# Altium PCB ATRACK_Dongle_V1.PcbDoc
Units mm, origin at the board's own origin, x right, y up, seen from the top; angles counter-clockwise.
Board outline 44 x 20.5 mm, 2 copper layers (Top Layer, Bottom Layer); 34 components, 28 nets, 135 pads, 10 vias.
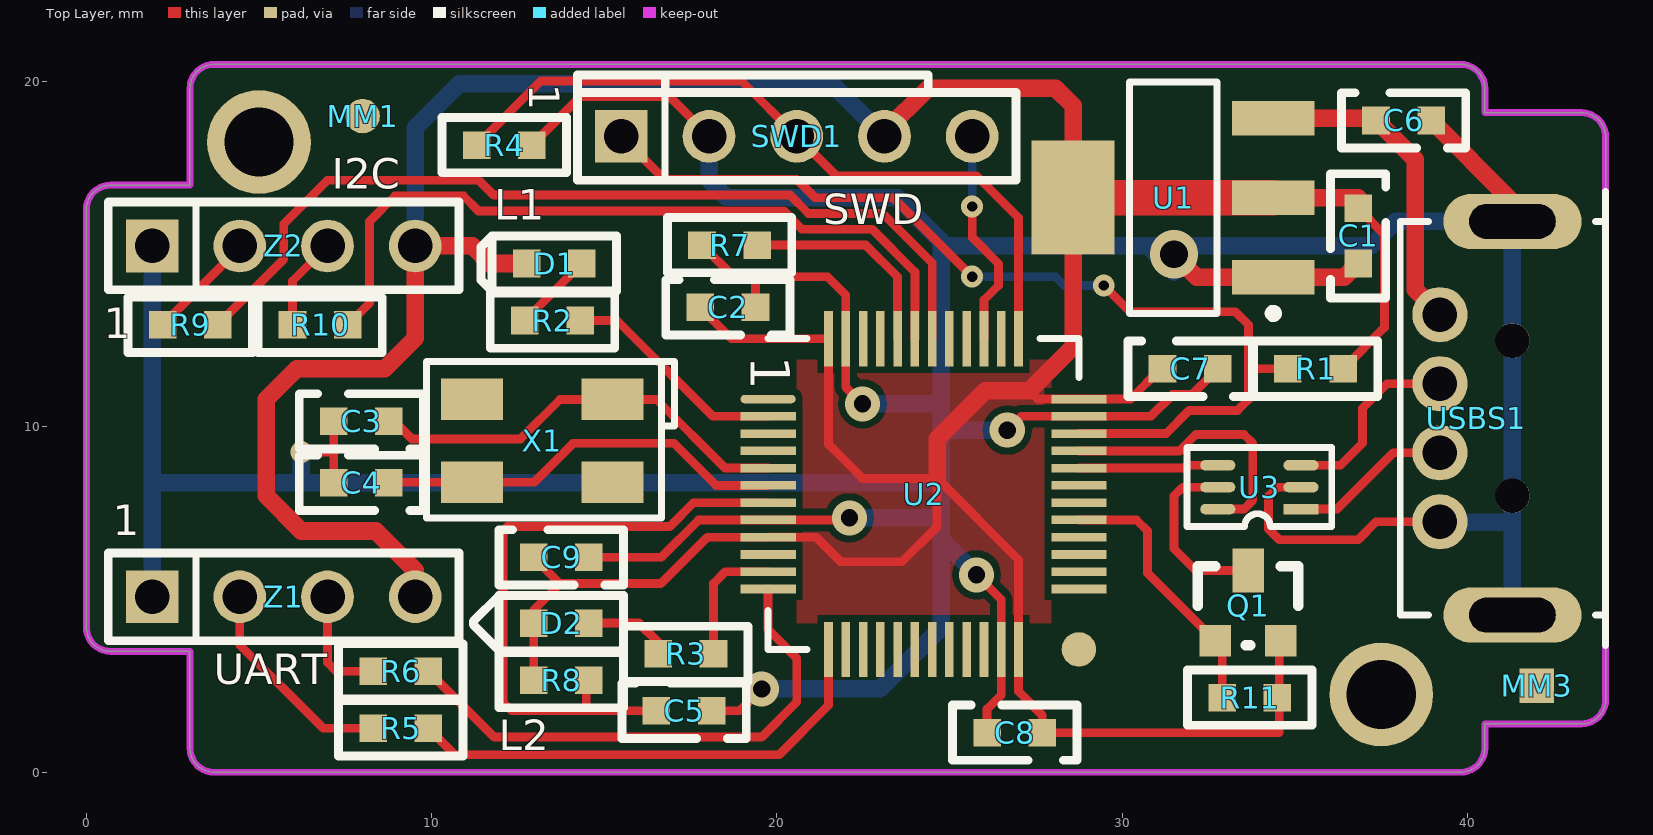
[diagram p0: Top Layer view]
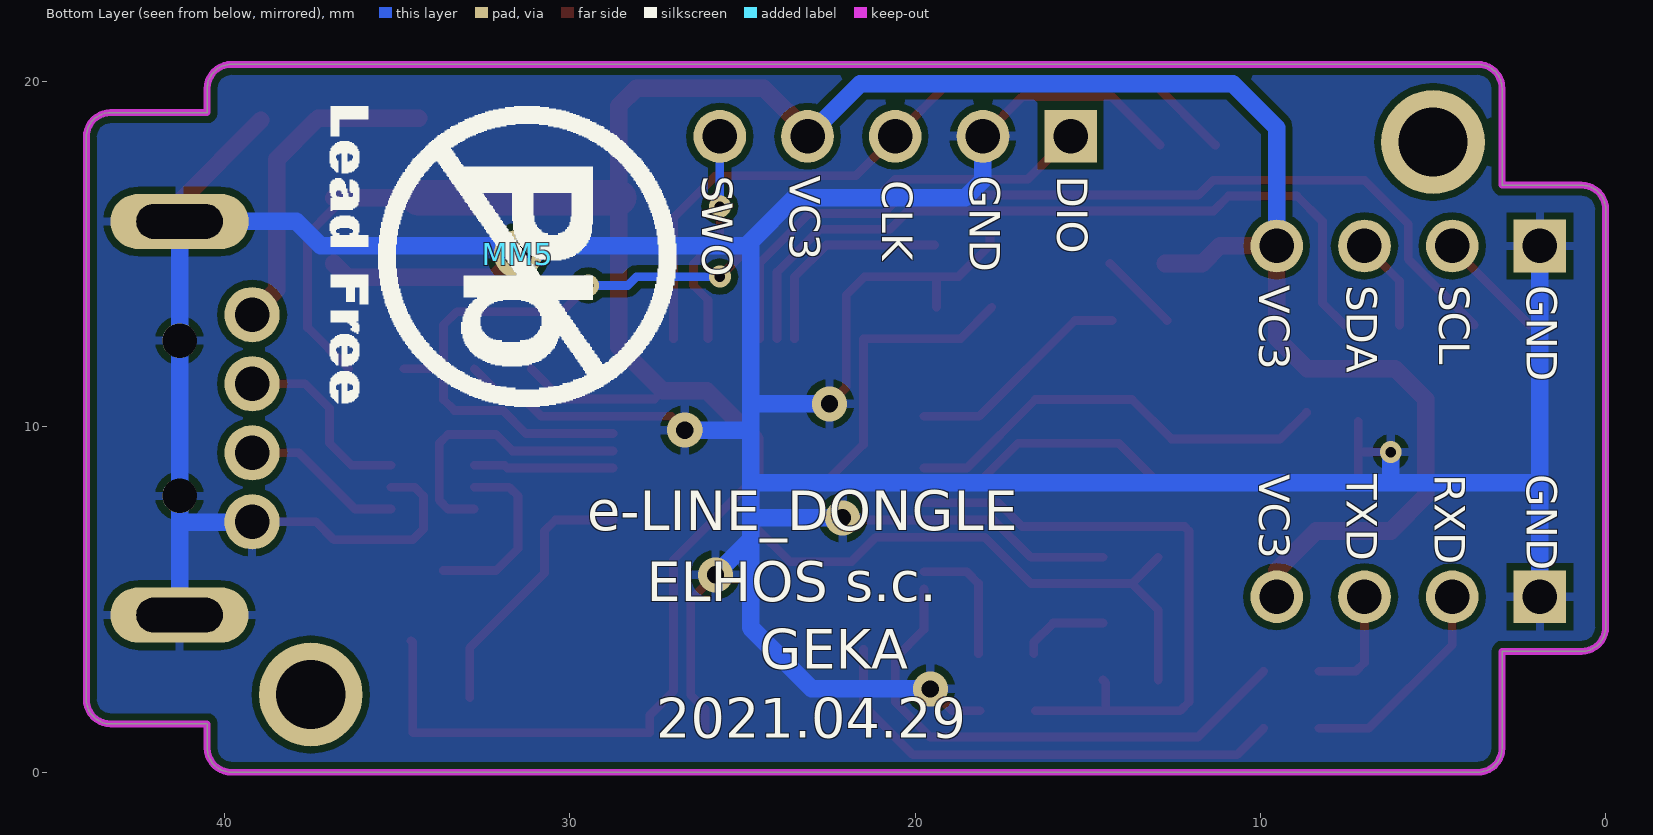
[diagram p1: Bottom Layer view, seen from below]

## Layer stack, top to bottom
Top Layer: signal copper 0.0356
Dielectric: dielectric 0.32, FR-4, Dk 4.8
Bottom Layer: signal copper 0.0356

## Board outline
3,0.7 3,3.5 0.7,3.5 cw(c0.7,4.2) 0,4.2 0,16.3 cw(c0.7,16.3) 0.7,17 3,17 3,19.8 cw(c3.7,19.8) 3.7,20.5 39.8,20.5 cw(c39.8,19.8) 40.5,19.8 40.5,19.1 43.3,19.1 cw(c43.3,18.4) 44,18.4 44,2.1 cw(c43.3,2.1) 43.3,1.4 40.5,1.4 40.5,0.7 cw(c39.8,0.7) 39.8,0 3.7,0 cw(c3.7,0.7)

## Design rules (kind name [scope] priority, off if disabled: settings)
Clearance [All] p1: gap=0.203
ComponentClearance [All] p1 off: gap=0.254 collisioncheckmode=3 verticalgap=0.254 showdistances=FALSE
HoleSize [All] p1: absolutevalues=TRUE maxlimit=2.54 minlimit=0.3 maxpercent=80.000 minpercent=20.000
MinimumSolderMaskSliver [All] p1: minsoldermaskwidth=0.102
PolygonConnect [All] p1: connectstyle=Relief reliefconductorwidth=0.254 reliefentries=4 polygonreliefangle="90 Angle"
RoutingVias [All] p1: holewidth=0.5 width=1.016 viastyle="Through Hole" minholewidth=0.3 minwidth=0.381 maxholewidth=2 maxwidth=5.08
SilkToSilkClearance [All] p1: silktosilkclearance=0.102
SilkscreenOverComponentPads [All] p1: minsilkscreentomaskgap=0.102
SolderMaskExpansion [All] p1: expansion=0.102
Width [All] p1: maxlimit=2.54 minlimit=0.203 preferedwidth=0.254 minimp=50.000000 maximp=50.000000 favimp=50.000000
23 further rules are at their usual default settings.

## Components (designator, comment, footprint, x,y, rotation, side; value= is the part's Value field where it differs from the comment)
C1 "1uF" 0603C 36.83,16.432 r90 top
C2 "100n" 0603C 17.68,13.462 r180 top
C3 "12pF" 0603C 8.863,10.16 r0 top
C4 "12pF" 0603C 8.863,8.382 r0 top
C5 "10n" 0603C 16.41,1.778 r180 top
C6 "100n" 0603C 37.25,18.875 r180 top
C7 "100n" 0603C 31.066,11.684 r180 top
C8 "100n" 0603C 27.786,1.143 r0 top
C9 "100n" 0603C 12.854,6.223 r180 top
D1 "" 0603LG 14.451,14.732 r0 top
D2 "" 0603LR 14.654,4.318 r0 top
MM1 "" REF_CIR 8,19 r0 top
MM3 "" REF_SQR 42,2.5 r0 top
MM5 "" PB_FREE_GRAF 31.5,15 r270 bottom
Q1 "IRLML6401" SOT23 33.68,6.02 r90 top
R1 "10k" 0603R 36.498,11.684 r0 top
R2 "1k" 0603R 12.6,13.081 r180 top
R3 "1k" 0603R 16.461,3.429 r180 top
R4 "10k" 0603R 13.003,18.161 r0 top
R5 "33R" 0603R 8.206,1.27 r180 top
R6 "33R" 0603R 8.206,2.921 r180 top
R7 "10k" 0603R 19.531,15.265 r0 top
R8 "10k" 0603R 12.854,2.667 r180 top
R9 "33R" 0603R 2.11,12.954 r180 top
R10 "33R" 0603R 5.869,12.954 r180 top
R11 "10k" 0603R 32.793,2.159 r180 top
SWD1 "ST-LINK" PIN5_SWD 15.494,18.415 r0 top
U1 "LM1117MP-3.3" MP04A_N1 34.375,14.337 r90 top
U2 "STM32F103C6Tx" LQFP48 19.745,10.806 r270 top
U3 "USBUF02W6" SOT323-6L 35.179,7.62 r180 top
USBS1 "Header 5" USB_KR 39.2,10.25 r90 top locked
X1 "ABM3B-8MHZ" XTAL3 15.24,10.795 r180 top
Z1 "CON4" PIN4 1.905,5.08 r0 top
Z2 "CON4" PIN4 1.905,15.24 r0 top

## Footprints (in the part's own frame and the unit in brackets; to place one, negate y for a bottom-side part, rotate by r counter-clockwise, add the part's x,y. Pads: shape width x height; smd on the part's side, far side on the other; paste and mask are expansions set on the pad)
0603C [mm]
  rect 0.8x0.8 smd: 1(-0.1,0) 2(-1.7,0)
  silkscreen extent -2.7,-0.8 0.9,0.8
0603LG [mm]
  rect 0.8x0.8 smd: A(-1.7,0) K(-0.1,0)
  silkscreen extent -3.03,-0.8 0.9,0.8
0603LR [mm]
  rect 0.8x0.8 smd: A(-1.7,0) K(-0.1,0)
  silkscreen extent -3.45,-0.8 0.9,0.8
0603R [mm]
  rect 0.8x0.8 smd: 1(-0.1,0) 2(-1.7,0)
  silkscreen extent -2.7,-0.8 0.9,0.8
LQFP48 [mm]
  oval 0.25x1.6 smd mask+0.152: 1(0,0)
  rect 0.25x1.6 smd mask+0.152: 2(0.5,0) 3(1,0) 4(1.5,0) 5(2,0) 6(2.5,0) 7(3,0) 8(3.5,0) 9(4,0) 10(4.5,0) 11(5,0) 12(5.5,0) 25(5.5,9) 26(5,9) 27(4.5,9) 28(4,9) 29(3.5,9) 30(3,9) 31(2.5,9) 32(2,9) 33(1.5,9) 34(1,9) 35(0.5,9) 36(0,9)
  rect 1.6x0.25 smd mask+0.152: 13(7.25,1.75) 14(7.25,2.25) 15(7.25,2.75) 16(7.25,3.25) 17(7.25,3.75) 18(7.25,4.25) 19(7.25,4.75) 20(7.25,5.25) 21(7.25,5.75) 22(7.25,6.25) 23(7.25,6.75) 24(7.25,7.25) 37(-1.75,7.25) 38(-1.75,6.75) 39(-1.75,6.25) 40(-1.75,5.75) 41(-1.75,5.25) 42(-1.75,4.75) 43(-1.75,4.25) 44(-1.75,3.75) 45(-1.75,3.25) 46(-1.75,2.75) 47(-1.75,2.25) 48(-1.75,1.75)
  round 1 smd paste-0.508 mask+0.5: ""(7.25,9)
  silkscreen extent -1.75,0 7.25,9
MP04A_N1 [mm]
  rect 1x2.4 smd: 1(0,0) 2(2.3,0) 3(4.6,0)
  rect 3.3x2.4 smd: 4(2.3,5.8)
  silkscreen extent -1.17,-0.12 5.65,4.17
PB_FREE_GRAF [mm]
  silkscreen extent -4.29,-5.46 4.43,4.59
PIN4 [mil]
  rect 60x60 hole 39.37: 1(0,0)
  round 60 hole 39.37: 2(100,0) 3(200,0) 4(300,0)
  silkscreen extent -50,-50 350,50
PIN5_SWD [mil]
  rect 60x60 hole 39.37: 1(0,0)
  round 60 hole 39.37: 2(100,0) 3(200,0) 4(300,0) 5(400,0)
  silkscreen extent -50,-50 450,70
REF_CIR [mm]
  round 1 smd paste-0.5 mask+0.5: 0(0,0)
REF_SQR [mm]
  rect 1x1 smd paste-0.5 mask+0.5: ""(0,0)
SOT23 [mil]
  rect 36x36 smd: 1(-87,39) 2(-87,-36)
  rect 50x36 smd: 3(-7,1)
  silkscreen extent -92,-56 -2,59
SOT323-6L [mil]
  rect 40x12 smd: 1(0,0)
  oval 40x12 smd: 2(0,-25) 3(0,-50) 4(95,-50) 5(95,-25) 6(95,0)
  silkscreen extent -35,-70 130,20
USB_KR [mm] "LUMBERG_2410-08"
  oval 1.6x4 hole 1 slot 2.5 at 90 deg: 0(-5.7,-2.1) 0(5.7,-2.1)
  round 1 hole 1: 0(-2.25,-2.1) 0(2.25,-2.1)
  round 1.6 hole 1: 1(3,0) 2(1,0) 3(-1,0) 4(-3,0)
  silkscreen extent -6.58,-4.8 6.58,1.15
XTAL3 [mm]
  rect 1.8x1.2 smd: 1(0,0) 2(4.069,0) 3(4.069,2.4) 4(0,2.4)
  silkscreen extent -1.79,-1.1 5.38,3.43

## Part data
C1 C2 C7 C8 C9: library part CAP
C3 C4 C5 C6: library part CAP, "Capacitor"
D1 D2: library part LED
MM1 MM3 MM5: library part MECH
Q1: library part IRLML9303, "Low Charge N-Channel MOSFET"
R1 R2 R3 R4 R7 R8 R11: library part RES3
R5 R6 R9 R10: library part RES1
SWD1: library part SW5_CON, "Header, 4-Pin"
U1: "800mA Low-Dropout Linear Regulator"
U2: library part STM32F103_LQFP48, "STM32F103CxTx"
U3: library part USBUF01W6
USBS1: "Header, 5-Pin"
X1: library part CRYSTAL, "Crystal"
Z1 Z2: "Connector"

## Free pads (board coordinates)
  round 3 hole 2: 0(5,18.25) 0(37.5,2.25)

## Via types
v1: diameter 1.016, hole 0.5, Top Layer to Bottom Layer, tented both sides, 5 vias
v2: diameter 0.635, hole 0.3, Top Layer to Bottom Layer, tented both sides, 4 vias
v3: diameter 1.4, hole 0.8, Top Layer to Bottom Layer, tented both sides, 1 vias

## Nets (pads, with @x,y where several pads share a name; then routed paths per layer and width w, separated by ;. In a path a pad name is that pad's centre, name@x,y a point inside that pad or via, vN(x,y) a via of type N, cw(c..) or ccw(c..) an arc to the next point about the centre after c; other vN are vias at no path point)
A_SCL: R9.2 U2.42 | length 26.2
  Top Layer w0.254: R9.2 5.715,14.859 5.715,15.875 6.985,17.145 11.367,17.145 11.798,16.713 20.382,16.713 20.916,16.179 23.064,16.179 24.495,14.748 U2.42
A_SDA: R10.2 U2.43 | length 22.2
  Top Layer w0.254: R10.2 8.204,13.589 8.204,15.951 8.941,16.688 10.922,16.688 11.354,16.256 20.193,16.256 20.727,15.722 22.759,15.722 23.995,14.486 U2.43
BOOT0: R7.1 U2.44 | length 6.2
  Top Layer w0.254: R7.1 22.569,15.265 23.495,14.339 U2.44
GND: C1.2 C2.2 C3.2 C4.2 C5.2 C6.2 C7.2 C8.2 C9.2 R4.1 R7.2 SWD1.2 U1.1 U2.8 U2.23 U2.35 U2.47 U3.2 USBS1.0 USBS1.4 Z1.1 Z2.1 | length 156.8
  Top Layer w0.254: v2(6.223,9.271) 7.163,9.271 ; C4.2 7.163,9.271 ; C3.2 7.163,9.271 ; R4.1 14.3,19.558 16.891,19.558 SWD1.2 ; C9.2 16.649,6.223 17.732,7.306 U2.8 22.038,7.306 v1(22.098,7.366) ; R7.2@17.831,15.494 R7.2 18.745,14.351 19.304,14.351 ; C5.2 18.923,1.778 v1(19.558,2.413) ; C2.2 19.38,14.275 19.304,14.351 ; v1(22.479,10.668) 21.995,11.152 U2.47 21.995,13.819 21.463,14.351 19.304,14.351 ; v1(25.781,5.715) 26.495,5.001 U2.23 26.495,2.238 26.086,1.829 C8.2 ; v1(26.67,9.906) 27.07,10.306 U2.35 30.829,10.306 31.458,10.935 32.017,10.935 C7.2 ; U3.2 34.493,8.255 34.239,8.001 34.239,7.036 34.544,6.731 36.83,6.731 37.349,7.25 USBS1.4
  Top Layer w0.508: v3(31.5,15) 32.163,14.337 U1.1 36.435,14.337 C1.2 ; C6.2 41.3,16.525 USBS1.0@41.3,15.95
  Bottom Layer w0.508: Z1.1 1.905,8.382 ; Z2.1 1.905,8.382 ; v2(6.223,9.271) 6.223,8.382 ; SWD1.2 18.034,17.145 18.542,16.637 23.495,16.637 24.765,15.367 ; v1(19.558,2.413) 22.987,2.413 24.765,4.191 24.765,6.731 ; v1(22.098,7.366) 24.765,7.366 ; v1(22.479,10.668) 24.765,10.668 ; v1(25.781,5.715) 24.765,6.731 ; v1(26.67,9.906) 24.765,9.906 ; v3(31.5,15) 31.5,14.474 30.734,15.24 ; USBS1.4@39.211,7.239 41.3,7.239 ; USBS1.0@41.3,4.55 41.3,7.239 ; 1.905,8.382 6.223,8.382 ; 6.223,8.382 24.765,8.382 ; 24.765,6.731 24.765,7.366 ; 24.765,7.366 24.765,8.382 ; 24.765,8.382 24.765,9.906 ; 24.765,9.906 24.765,10.668 ; 24.765,10.668 24.765,15.367 ; 24.765,15.367 24.892,15.24 30.734,15.24 ; 30.734,15.24 37.211,15.24 37.921,15.95 41.3,15.95 41.3,12.5 41.3,8 41.3,7.239
LED1: R2.2 U2.2 | length 6.6
  Top Layer w0.254: R2.2 15.367,13.081 18.142,10.306 U2.2
LED2: R3.2 U2.11 | length 3.8
  Top Layer w0.254: R3.2 18.161,5.461 18.506,5.806 U2.11
NetC3_1: C3.1 U2.5 X1.1 | length 12.7
  Top Layer w0.254: C3.1@8.663,10.414 9.425,9.652 12.573,9.652 13.716,10.795 X1.1 16.51,10.795 18.499,8.806 U2.5
NetC4_1: C4.1 U2.6 X1.3 | length 12
  Top Layer w0.254: C4.1 8.776,8.395 X1.3 12.967,8.395 14.097,9.525 17.018,9.525 18.237,8.306 U2.6
NetD1_K: D1.K R2.1 | length 2.3
  Top Layer w0.254: R2.1 D1.K
NetD2_K: D2.K R3.1 | length 2.6
  Top Layer w0.254: D2.K 16.002,4.318 16.561,3.759 R3.1
NetR5_1: R5.1 Z1.2 | length 6.3
  Top Layer w0.254: Z1.2 4.445,3.683 6.858,1.27 R5.1
NetR6_1: R6.1 Z1.3 | length 3.3
  Top Layer w0.254: Z1.3 6.985,3.175 7.239,2.921 R6.1
NetR9_1: R9.1 Z2.2 | length 3.2
  Top Layer w0.254: R9.1 4.445,15.189 Z2.2
NetR10_1: R10.1 Z2.3 | length 2.7
  Top Layer w0.254: R10.1 5.969,14.224 Z2.3
RESET: C5.1 R8.2 U2.7 | length 18.4
  Top Layer w0.254: R8.2 14.478,2.591 14.478,1.778 ; C5.1 14.478,1.778 ; U2.7 17.585,7.806 16.891,7.112 12.192,7.112 12.065,6.985 12.065,2.032 12.319,1.778 14.478,1.778
RXD0: R5.2 U2.13 | length 14.1
  Top Layer w0.254: R5.2 10.668,0.508 20.066,0.508 21.495,1.937 U2.13
SWCLK: R4.2 SWD1.3 U2.37 | length 21.6
  Top Layer w0.254: R4.2 13.157,20.015 18.974,20.015 SWD1.3 21.717,17.272 25.781,17.272 26.995,16.058 U2.37
SWDIO: R1.2 SWD1.1 U2.34 | length 29
  Top Layer w0.254: SWD1.1 16.739,17.17 20.572,17.17 21.105,16.637 23.368,16.637 v2(25.654,14.351) ; U2.34 31.269,9.806 31.941,10.477 33.337,10.477 33.655,10.795 33.655,11.684 ; v2(29.464,14.097) 30.226,13.335 33.274,13.335 33.655,12.954 33.655,11.684 ; R1.2 33.655,11.684
  Bottom Layer w0.254: v2(25.654,14.351) 28.067,14.351 28.321,14.097 v2(29.464,14.097)
SWO: SWD1.5 U2.39 | length 6.3
  Top Layer w0.254: v2(25.654,16.383) 25.654,15.489 26.416,14.727 26.416,14.097 25.995,13.676 U2.39
  Bottom Layer w0.254: v2(25.654,16.383) SWD1.5
TXD0: R6.2 U2.12 | length 15.5
  Top Layer w0.254: R6.2 11.811,1.016 19.558,1.016 20.574,2.032 20.574,3.302 19.745,4.131 U2.12
USB_ON: Q1.1 R11.1 U2.29 | length 7.8
  Top Layer w0.254: U2.29 30.413,7.306 30.734,6.985 30.734,5.766 Q1.1 32.893,3.607 R11.1
USBDN: U2.32 U3.4 | length 4.1
  Top Layer w0.254: U2.32 31.805,8.806 31.889,8.89 U3.4
USBDP: U2.33 U3.6 | length 8.1
  Top Layer w0.254: U2.33 31.658,9.306 32.131,9.779 33.528,9.779 33.782,9.525 33.782,7.874 33.528,7.62 U3.6
USBN: U3.3 USBS1.2 | length 5.6
  Top Layer w0.254: U3.3 36.322,8.89 36.957,9.525 36.957,10.541 37.666,11.25 USBS1.2
USBP: U3.1 USBS1.3 | length 4.7
  Top Layer w0.254: U3.1 36.217,7.62 37.847,9.25 USBS1.3
V_STER: Q1.3 U3.5 | length 5.3
  Top Layer w0.254: U3.5 31.75,8.255 31.496,8.001 31.496,6.477 32.131,5.842 Q1.3
VC3: C1.1 C2.1 C7.1 C8.1 C9.1 D1.A D2.A Q1.2 R1.1 R8.1 R11.2 SWD1.4 U1.2 U1.4 U2.9 U2.24 U2.36 U2.48 Z1.4 Z2.4 | length 122.2
  Top Layer w0.254: R8.1 D2.A 12.954,4.699 13.716,5.461 ; C9.1 13.716,5.461 ; C2.1 18.686,12.556 U2.48 21.495,9.493 22.479,8.509 24.638,8.509 ; 27.305,11.049 27.548,10.806 U2.36 30.237,10.806 C7.1@31.115,11.684 ; Q1.2 34.544,3.759 34.544,1.143 C8.1 27.686,1.651 26.995,2.342 U2.24 26.995,6.152 24.638,8.509 ; R1.1 37.592,12.878 37.592,15.57 C1.1 ; 13.716,5.461 16.637,5.461 17.982,6.806 U2.9 21.134,6.806 21.844,6.096 23.622,6.096 24.638,7.112 24.638,8.509
  Top Layer w0.508: Z1.4 9.525,5.842 8.382,6.985 6.223,6.985 5.207,8.001 5.207,10.795 6.096,11.684 8.636,11.684 9.525,12.573 Z2.4 11.176,15.24 11.684,14.732 D1.A ; SWD1.4 23.114,18.542 24.384,19.812 28.067,19.812 28.575,19.304 U1.4 28.575,12.319 27.305,11.049 26.035,11.049 24.638,9.652 24.638,8.509 ; U1.2 C1.1@36.83,16.637
  Top Layer w1.016: U1.4 U1.2
  Bottom Layer w0.508: Z2.4 9.525,18.669 10.795,19.939 21.59,19.939 SWD1.4
VC5: C6.1 U1.3 USBS1.1 | length 9.4
  Top Layer w0.508: U1.3 37.288,18.937 C6.1 38.481,17.744 38.481,13.969 USBS1.1
pads on no net: MM1.0 MM3. U2. U2.1 U2.3 U2.4 U2.10 U2.14 U2.15 U2.16 U2.17 U2.18 U2.19 U2.20 U2.21 U2.22 U2.25 U2.26 U2.27 U2.28 U2.30 U2.31 U2.38 U2.40 U2.41 U2.45 U2.46 X1.2 X1.4

## Polygon pours and split planes (outlines as drawn)
VC3 on Top Layer "PVC3" (solid, pour order 2): 20.574,11.811 20.574,4.318 27.94,4.318 27.94,11.938 20.574,11.938
GND on Bottom Layer "PGND" (solid, remove dead copper, pour order 4): 0,20.955 0,0 44.45,0 44.45,20.955

## Keep-outs
Keep-Out Layer:
  the board outline again, w0.2

## Silkscreen, mask and mechanical layers (free items; w line width, h text height)
Top Overlay:
  text "1" at 12.827,19.939 h0.89 r270
  text "I2C" at 7.112,16.891 h0.89
  text "L1" at 11.811,16.002 h0.89
  text "SWD" at 21.336,15.875 h0.89
  text "1" at 0.508,12.573 h0.89
  text "1" at 0.762,6.858 h0.89
  text "UART" at 3.683,2.54 h0.89
  text "L2" at 11.938,0.635 h0.89
Bottom Overlay:
  text "DIO" at 15.875,17.272 h0.89 r90
  text "GND" at 18.415,17.272 h0.89 r90
  text "VC3" at 23.622,17.272 h0.89 r90
  text "SWO" at 26.162,17.272 h0.89 r90
  text "CLK" at 20.955,17.145 h0.89 r90
  text "GND" at 2.286,14.097 h0.89 r90
  text "SCL" at 4.826,14.097 h0.89 r90
  text "SDA" at 7.493,14.097 h0.89 r90
  text "VC3" at 10.033,14.097 h0.89 r90
  text "GND" at 2.286,8.636 h0.89 r90
  text "RXD" at 4.953,8.636 h0.89 r90
  text "TXD" at 7.493,8.636 h0.89 r90
  text "VC3" at 10.033,8.636 h0.89 r90
  text "e-LINE_DONGLE" at 29.5,7 h1.14
  text "ELHOS s.c." at 27.772,4.951 h1.14
  text "GEKA" at 24.5,3 h1.14
  text "2021.04.29" at 27.5,1 h1.14
Mechanical 1:
  the board outline again, w0.2
Mechanical 15:
  lines w0.2: 44,10.25 45.375,10.25

## Text inside footprints (layer, text, board x,y; h text height)
U2: Top Overlay "1" at 19.245,12.056 h1.14 r270